# Altium PCB SIP00000AG.PcbDoc
Units mm, origin at the board's own origin, x right, y up, seen from the top; angles counter-clockwise.
Board outline 1054.6 x 677.8 mm, 2 copper layers (Top Layer, Bottom Layer); 88 components, 71 nets, 360 pads, 103 vias.
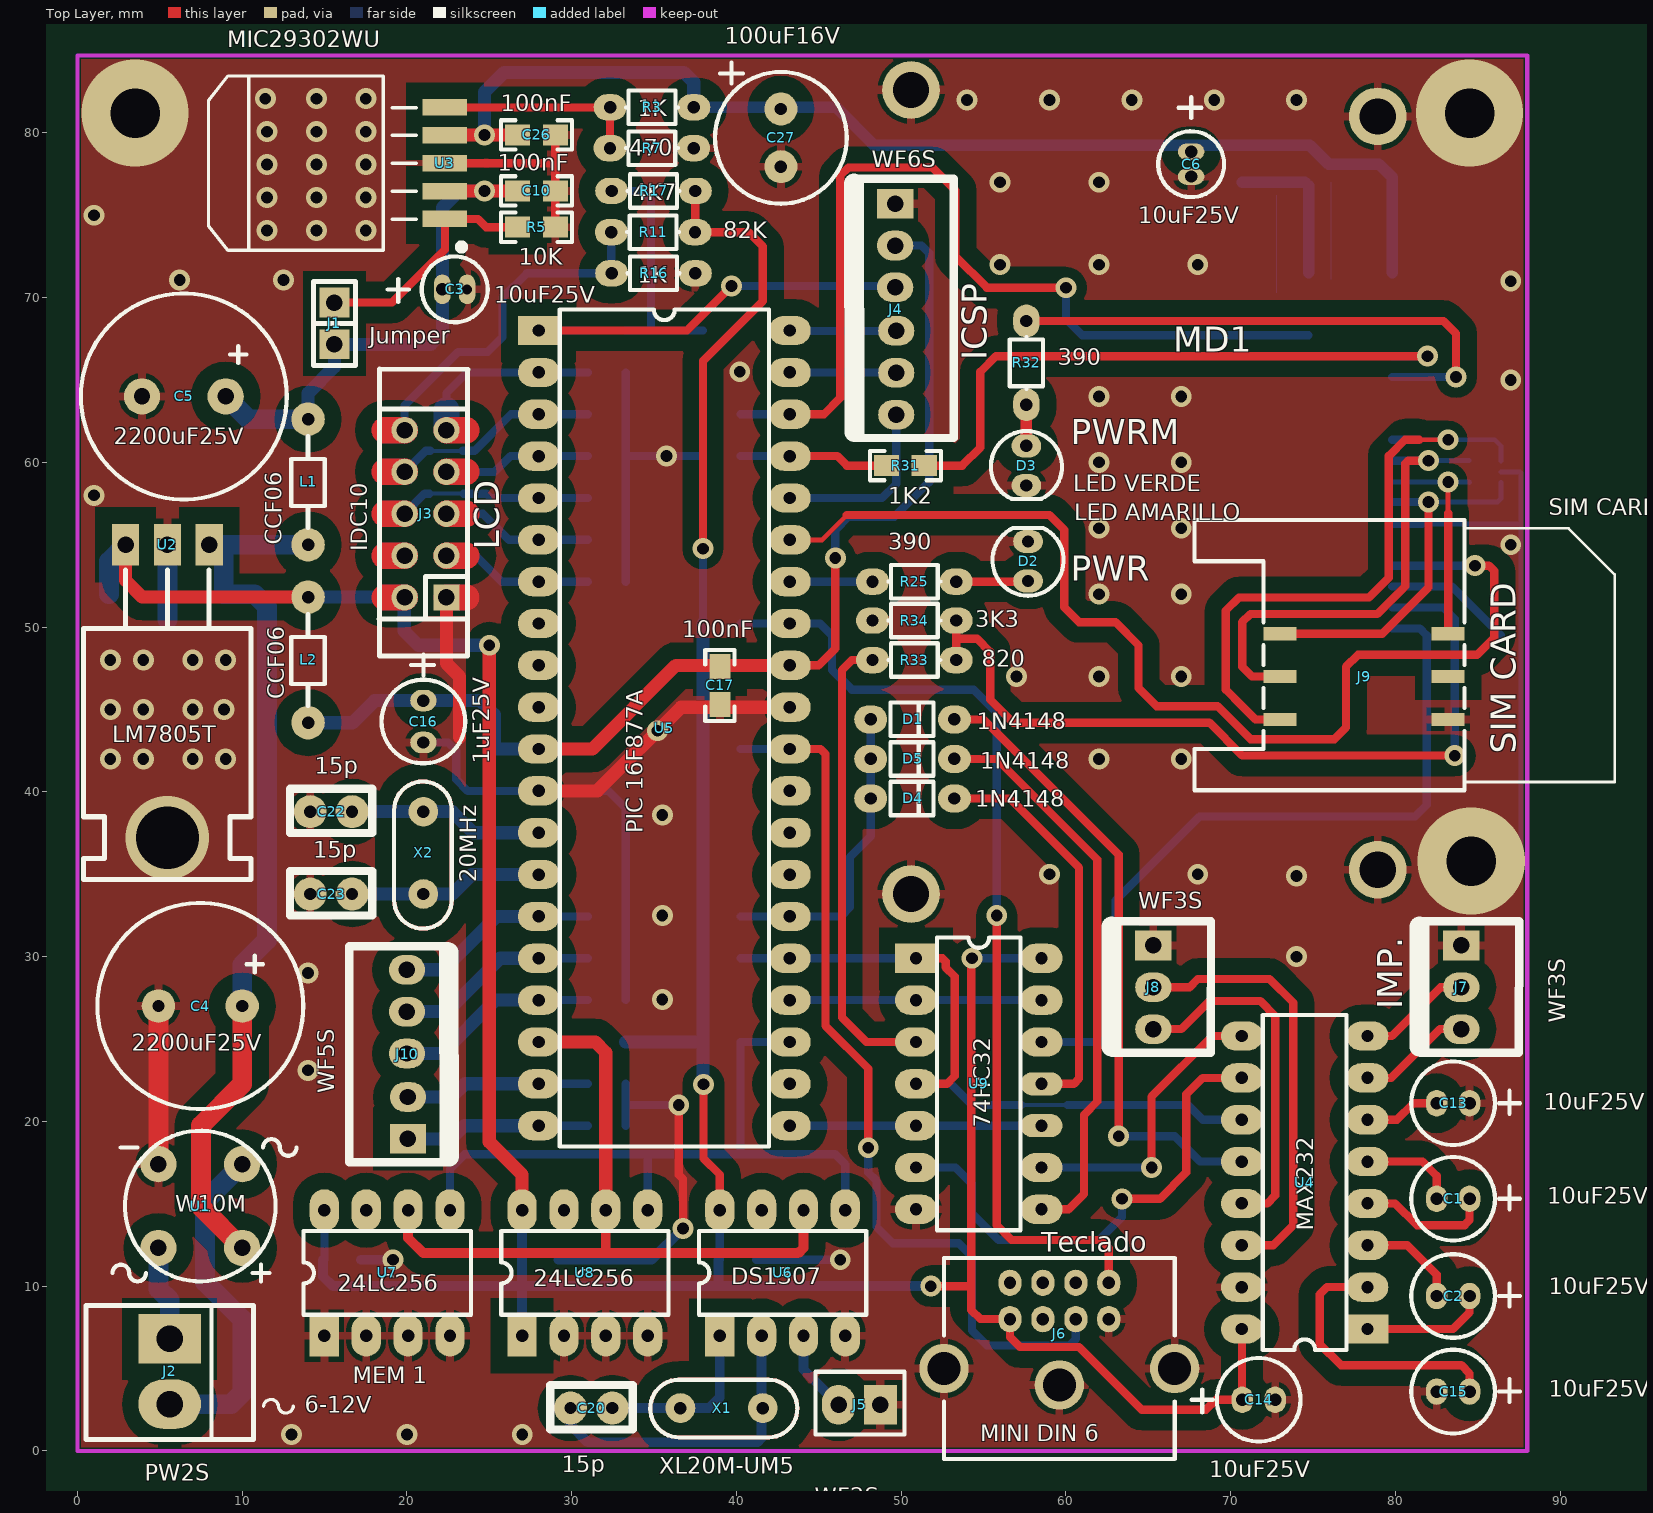
[diagram p0: Top Layer view]
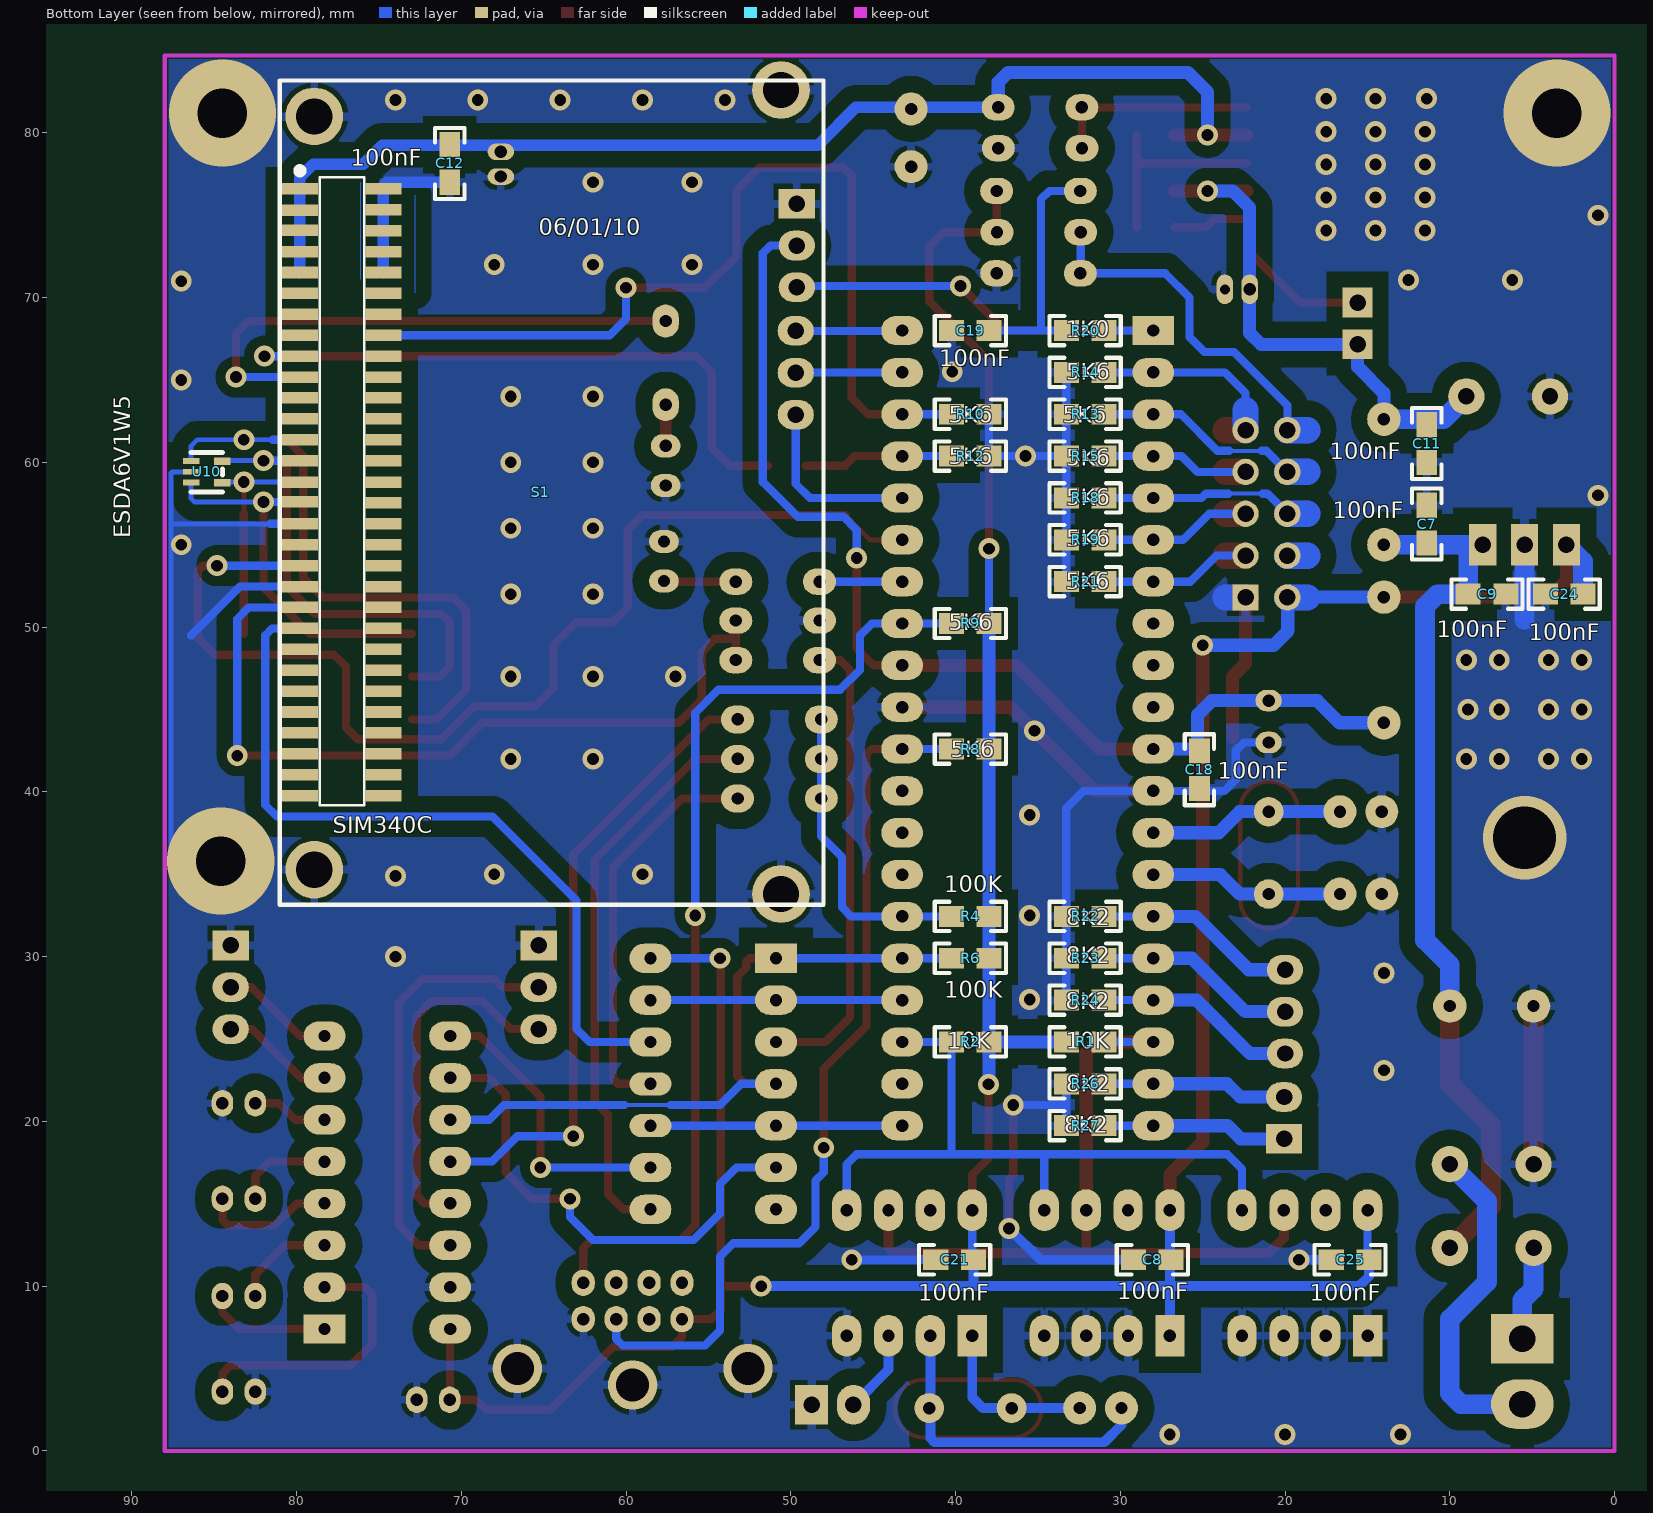
[diagram p1: Bottom Layer view, seen from below]

## Layer stack, top to bottom
Top Layer: signal copper 0.0356
Dielectric: dielectric 0.32, FR-4, Dk 4.8
Bottom Layer: signal copper 0.0356

## Board outline
-492,-340.1 -492,337.7 562.6,337.7 562.6,-340.1

## Design rules (kind name [scope] priority, off if disabled: settings)
Clearance VIAS [InNet('GND') vs (IsVia)] p1: gap=0.5
Clearance pilares [InNet('GND') vs (HasFootprint('TORNILLO 4-40'))] p2: gap=0
Clearance "Keep Out" [All vs OnLayer('Keep-Out Layer')] p3: gap=0.1
Clearance GNd [InNet('GND') vs InNet('GND')] p4: gap=0.3
Clearance [All] p5: gap=1
ComponentClearance [All] p1: gap=0.254 collisioncheckmode=3 verticalgap=0.254
PolygonConnect [All] p1: connectstyle=Relief reliefconductorwidth=0.5 reliefentries=4 polygonreliefangle="90 Angle"
RoutingVias [All] p1: holewidth=0.711 width=1.27 viastyle="Through Hole" minholewidth=0.711 minwidth=1.27 maxholewidth=0.711 maxwidth=1.27
SolderMaskExpansion [All] p1: expansion=0.102
TestPointUsage [All] p1: valid=0 allowmultiple=FALSE
Testpoint [All] p1: side=15 testpointundercomponent=TRUE minsize=1.016 maxsize=2.54 preferedsize=1.524 minholesize=0 maxholesize=1.016 preferedholesize=0.813 testpointgrid=0.025 style=1023 order=0123456789
Width [All] p1: maxlimit=2 minlimit=0.01 preferedwidth=0.2 toplayer_prefwidth=0.5 bottomlayer_prefwidth=0.5 minimp=50.000000 maximp=50.000000 favimp=50.000000
17 further rules are at their usual default settings.

## Components (designator, comment, footprint, x,y, rotation, side; value= is the part's Value field where it differs from the comment)
C1 "10uF25V" "CE 2.0/5.0" 83.5,15.3 r0 top locked
C2 "10uF25V" "CE 2.0/5.0" 83.5,9.4 r0 top locked
C3 "10uF25V" "CE 1.5/4.0"#1 22.9,70.5 r180 top locked
C4 "2200uF25V" "CE 5.0/12.5"#1 10,27 r0 top locked
C5 "2200uF25V" "CE 5.0/12.5"#2 9,64 r0 top locked
C6 "10uF25V" "CE 1.5/4.0"#2 67.6,78.1 r90 top locked
C7 "100nF" 0805 11.4,57.4 r270 bottom locked
C8 "100nF" 0805 29.2,11.6 r180 bottom locked
C9 "100nF" 0805 6.6,52 r0 bottom locked
C10 "100nF" 0805 29.007,76.473 r180 top locked
C11 "100nF" 0805 11.4,60 r90 bottom locked
C12 "100nF" 0805 70.7,77 r90 bottom locked
C13 "10uF25V" "CE 2.0/5.0" 83.5,21.1 r0 top locked
C14 "10uF25V" "CE 2.0/5.0" 71.7,3.1 r180 top locked
C15 "10uF25V" "CE 2.0/5.0" 83.5,3.6 r0 top locked
C16 "1uF25V" "CE 2.5/5.0" 21,43 r90 top locked
C17 "100nF" 0805 39,47.6 r270 top locked
C18 "100nF" 0805 25.2,40.2 r90 bottom locked
C19 "100nF" 0805 40.25,68 r180 bottom locked
C20 "15p" CAP2.54 31.2,2.6 r0 top locked
C21 "100nF" 0805 41.2,11.6 r180 bottom locked
C22 "15p" CAP2.54 15.4,38.8 r0 top locked
C23 "15p" CAP2.54 15.4,33.8 r0 top locked
C24 "100nF" 0805 4.2,52 r180 bottom locked
C25 "100nF" 0805 17.2,11.6 r180 bottom locked
C26 "100nF" 0805 29.007,79.873 r180 top locked
C27 "100uF16V" "CE 3.5/8.0" 42.7,79.7 r90 top locked
D1 "1N4148" DO-35_200 48.15,44.4 r0 top locked
D2 "LED AMARILLO" "LED 3MM" 57.7,55.2 r90 top locked
D3 "LED VERDE" "LED 3MM" 57.6,58.6 r270 top locked
D4 "1N4148" DO-35_200 48.15,39.6 r0 top locked
D5 "1N4148" DO-35_200 48.15,42 r0 top locked
J1 "Jumper" IDC2 15.6,69.7 r180 top locked
J2 "PW2S" PW2S 5.6,6.8 r270 top locked
J3 "IDC10" IDC10 22.4,51.8 r90 top locked
J4 "WF6S" WF6S 49.7,62.9 r90 top locked
J5 "WF2S" WF2S 46.2,2.8 r0 top locked
J6 "MINI DIN 6" "MINI DIN PCB" 58.6,8 r180 top locked
J7 "WF3S" WF3S 84,25.6 r90 top locked
J8 "WF3S" WF3S 65.3,25.6 r90 top locked
J9 "SIM CARD HOLDER" "SIM CARD HOLDER" 73,44.4 r90 top locked
J10 "WF5S" WF5S 20,29.2 r270 top locked
L1 "CCF06" AXIAL10X4_300 14,55 r90 top locked
L2 "CCF06" AXIAL10X4_300 14,44.2 r90 top locked
R1 "10K" 0805 30.99,24.82 r0 bottom locked
R2 "10K" 0805 40.25,24.82 r180 bottom locked
R3 "1K" RES_MF1/2W_200 32.333,81.547 r0 top locked
R4 "100K" 0805 40.25,32.44 r180 bottom locked
R5 "10K" 0805 29.007,74.273 r180 top locked
R6 "100K" 0805 40.25,29.9 r180 bottom locked
R7 "470" RES_MF1/2W_200 37.407,79.073 r180 top locked
R8 "5K6" 0805 40.25,42.6 r180 bottom locked
R9 "5K6" 0805 40.25,50.22 r180 bottom locked
R10 "5K6" 0805 40.25,62.92 r180 bottom locked
R11 "82K" RES_MF1/2W_200 32.407,73.973 r0 top locked
R12 "5K6" 0805 40.25,60.38 r180 bottom locked
R13 "5K6" 0805 30.99,62.92 r0 bottom locked
R14 "5K6" 0805 30.99,65.46 r0 bottom locked
R15 "5K6" 0805 30.99,60.38 r0 bottom locked
R16 "1K" RES_MF1/2W_200 37.507,71.473 r180 top locked
R17 "4K7" RES_MF1/2W_200 37.507,76.473 r180 top locked
R18 "5K6" 0805 30.99,57.84 r0 bottom locked
R19 "5K6" 0805 30.99,55.3 r0 bottom locked
R20 "1K0" 0805 30.99,68 r0 bottom locked
R21 "5K6" 0805 30.99,52.76 r0 bottom locked
R22 "8K2" 0805 30.99,32.44 r0 bottom locked
R23 "8K2" 0805 30.99,29.9 r0 bottom locked
R24 "8K2" 0805 30.99,27.36 r0 bottom locked
R25 "390" RES_MF1/2W_200 48.26,52.76 r0 top locked
R26 "8K2" 0805 30.99,22.28 r0 bottom locked
R27 "8K2" 0805 30.99,19.74 r0 bottom locked
R31 "1K2" 0805 51.4,59.8 r180 top locked
R32 "390" RES_MF1/2W_200 57.6,63.5 r90 top locked
R33 "820" RES_MF1/2W_200 48.26,48 r0 top locked
R34 "3K3" RES_MF1/2W_200 48.26,50.4 r0 top locked
S1 "SIM340C" SIM340C 76.8,76.6 r180 bottom locked
U1 "W10M" CASE22 10,17.4 r0 top locked
U2 "LM7805T" TO-220_1 8,55 r180 top locked
U3 "MIC29302WU" TO-220-5S 22.307,74.773 r90 top locked
U4 "MAX232" DIP16 78.3,7.4 r180 top locked
U5 "PIC 16F877A" DIP40 28,68 r0 top locked
U6 "DS1307" DIP8 42.8,10.8 r90 top locked
U7 "24LC256" DIP8 18.8,10.8 r90 top locked
U8 "24LC256" DIP8 30.8,10.8 r90 top locked
U9 "74HC32" DIP14 50.9,29.9 r0 top locked
U10 "ESDA6V1W5" SOT-323-5L 84.1,58.8 r90 bottom locked
X1 "XL20M-UM5" UM5#1 41.6,2.6 r180 top locked
X2 "20MHz" UM5#2 21,33.8 r90 top locked

## Footprints (in the part's own frame and the unit in brackets; to place one, negate y for a bottom-side part, rotate by r counter-clockwise, add the part's x,y. Pads: shape width x height; smd on the part's side, far side on the other; paste and mask are expansions set on the pad)
0805 [mil]
  rect 60x50 smd: 1(0,0) 2(90,0)
  silkscreen extent -40,-35 130,35
AXIAL10X4_300 [mil]
  round 80 hole 29.53: 1(0,0) 2(300,0)
  silkscreen extent 41,-40 259,40
CAP2.54 [mm] "CAPACITOR AXIAL 2.54"
  round 2 hole 0.75: 1(-1.27,0) 2(1.27,0)
  silkscreen extent -2.5,-1.3 2.5,1.4
CASE22 [mm]
  round 2.2 hole 1: 1(0,-5.08) 2(0,0) 3(-5.08,0) 4(-5.08,-5.08)
  silkscreen extent -7.87,-7.11 3.3,2.03
"CE 1.5/4.0"#1 [mm]
  oval 1x1.8 hole 0.75: 1(0.75,0)
  oval 1x1.8 hole 0.6: 2(-0.75,0)
  silkscreen extent -2,-2 4.06,2
"CE 1.5/4.0"#2 [mm]
  oval 1x1.6 hole 0.75: 1(0.75,0) 2(-0.75,0)
  silkscreen extent -2,-2 4.06,2
"CE 2.0/5.0" [mm]
  oval 1.3x1.6 hole 0.75: 1(1,0) 2(-1,0)
  silkscreen extent -2.54,-2.54 4.06,2.54
"CE 2.5/5.0" [mm]
  oval 1.3x1.6 hole 0.75: 1(2.54,0) 2(0,0)
  silkscreen extent -1.27,-2.54 5.33,2.54
"CE 3.5/8.0" [mm]
  round 2 hole 0.75: 1(1.75,0) 2(-1.75,0)
  silkscreen extent -4,-4 4.57,4
"CE 5.0/12.5"#1 [mil]
  round 80 hole 29.53: 1(0,0) 2(-200,0)
  silkscreen extent -346,-246 146,246
"CE 5.0/12.5"#2 [mil]
  round 86.61 hole 39.37: 1(0,0) 2(-200,0)
  silkscreen extent -346,-246 146,246
DIP8 [mm]
  rect 2.54x1.778 hole 0.75: 1(-3.81,3.81)
  oval 2.54x1.778 hole 0.75: 2(-3.81,1.27) 3(-3.81,-1.27) 4(-3.81,-3.81) 5(3.81,-3.81) 6(3.81,-1.27) 7(3.81,1.27) 8(3.81,3.81)
  silkscreen extent -2.54,-5.08 2.54,5.08
DIP14 [mm]
  rect 2.54x1.778 hole 0.75: 1(0,0)
  oval 2.54x1.778 hole 0.75: 2(0,-2.54) 3(0,-5.08) 4(0,-7.62) 5(0,-10.16) 6(0,-12.7) 7(0,-15.24) 8(7.62,-15.24) 9(7.62,-12.7) 12(7.62,-5.08) 13(7.62,-2.54) 14(7.62,0)
  oval 2.54x1.4 hole 0.75: 10(7.62,-10.16) 11(7.62,-7.62)
  silkscreen extent 1.27,-16.51 6.35,1.27
DIP16 [mm]
  rect 2.54x1.778 hole 0.75: 1(0,0)
  oval 2.54x1.778 hole 0.75: 2(0,-2.54) 3(0,-5.08) 4(0,-7.62) 5(0,-10.16) 6(0,-12.7) 7(0,-15.24) 8(0,-17.78) 9(7.62,-17.78) 10(7.62,-15.24) 11(7.62,-12.7) 12(7.62,-10.16) 13(7.62,-7.62) 14(7.62,-5.08) 15(7.62,-2.54) 16(7.62,0)
  silkscreen extent 1.27,-19.05 6.35,1.27
DIP40 [mm]
  rect 2.54x1.778 hole 0.75: 1(0,0)
  oval 2.54x1.778 hole 0.75: 2(0,-2.54) 3(0,-5.08) 4(0,-7.62) 5(0,-10.16) 6(0,-12.7) 7(0,-15.24) 8(0,-17.78) 9(0,-20.32) 10(0,-22.86) 11(0,-25.4) 12(0,-27.94) 13(0,-30.48) 14(0,-33.02) 15(0,-35.56) 16(0,-38.1) 17(0,-40.64) 18(0,-43.18) 19(0,-45.72) 20(0,-48.26) 21(15.24,-48.26) 22(15.24,-45.72) 23(15.24,-43.18) 24(15.24,-40.64) 25(15.24,-38.1) 26(15.24,-35.56) 27(15.24,-33.02) 28(15.24,-30.48) 29(15.24,-27.94) 30(15.24,-25.4) 31(15.24,-22.86) 32(15.24,-20.32) 33(15.24,-17.78) 34(15.24,-15.24) 35(15.24,-12.7) 36(15.24,-10.16) 37(15.24,-7.62) 38(15.24,-5.08) 39(15.24,-2.54) 40(15.24,0)
  silkscreen extent 1.27,-49.53 13.97,1.27
DO-35_200 [mm]
  oval 2x1.7 hole 0.75: A(0,0) K(5.08,0)
  silkscreen extent 1.21,-1.02 3.81,1.02
IDC2 [mm]
  rect 1.8x1.8 hole 1: 1(0,0) 2(0,2.54)
  silkscreen extent -1.27,-1.27 1.27,3.81
IDC10 [mm]
  rect 1.6x1.6 hole 1: 1(0,0)
  round 1.6 hole 1: 2(0,2.54) 3(2.54,0) 4(2.54,2.54) 5(5.08,0) 6(5.08,2.54) 7(7.62,0) 8(7.62,2.54) 9(10.16,0) 10(10.16,2.54)
  silkscreen extent -3.56,-1.3 13.86,4.09
"LED 3MM" [mm]
  oval 1.4x1.8 hole 0.75: A(-2.4,0) K(0,0)
  silkscreen extent -3.3,-2.16 0.82,2.16
"MINI DIN PCB" [mm] "CONECTOR MINI DIN 6 A 90 GRADOS PARA PCB"
  oval 1.4x1.6 hole 0.75: 1(-2,0) 2(0,0) 3(-4,0) 4(2,0) 5(-4,-2.2) 6(2,-2.2) 7(-2,-2.2) 8(0,-2.2)
  round 3 hole 2: 9(-8,3) 9(-1,4) 9(6,3)
  silkscreen extent -8,-3.7 6,8.5
PW2S [mm]
  rect 3x3.8 hole 1.6: 1(0,0)
  oval 3x3.8 hole 1.6: 2(3.962,0)
  silkscreen extent -2.03,-5.08 6.11,5.08
RES_MF1/2W_200 [mm]
  oval 2x1.6 hole 0.75: 1(0,0) 2(5.08,0)
  silkscreen extent 0.97,-1.02 4.11,1.02
SIM340C [mm] "SIM340C"
  round 3.5 hole 2.2: 0(-2.125,-41.325) 0(-2.125,4.4) 0(26.2,-42.8) 0(26.2,6)
  rect 2.2x0.7 smd: 1(-3,0) 2(2.076,0) 3(-3,-1.3) 4(2.076,-1.269) 5(-3,-2.5) 6(2.076,-2.538) 7(-3,-3.807) 8(2.076,-3.807) 9(-3,-5.076) 10(2.076,-5.076) 11(-3,-6.345) 12(2.076,-6.345) 13(-3,-7.614) 14(2.076,-7.614) 15(-3,-8.883) 16(2.076,-8.883) 17(-3,-10.152) 18(2.076,-10.152) 19(-3,-11.421) 20(2.076,-11.421) 21(-3,-12.69) 22(2.076,-12.69) 23(-3,-13.959) 24(2.076,-13.959) 25(-3,-15.228) 26(2.076,-15.228) 27(-3,-16.497) 28(2.076,-16.497) 29(-3,-17.793) 30(2.076,-17.793) 31(-3,-19) 32(2.076,-19.062) 33(-3,-20.331) 34(2.076,-20.331) 35(-3,-21.6) 36(2.076,-21.6) 37(-3,-22.869) 38(2.076,-22.869) 39(-3,-24.138) 40(2.076,-24.138) 41(-3,-25.407) 42(2.076,-25.407) 43(-3,-26.676) 44(2.076,-26.676) 45(-3,-27.945) 46(2.076,-27.945) 47(-3,-29.214) 48(2.076,-29.214) 49(-3,-30.483) 50(2.076,-30.483) 51(-3,-31.752) 52(2.076,-31.752) 53(-3,-33.021) 54(2.076,-33.021) 55(-3,-34.29) 56(2.076,-34.29) 57(-3,-35.559) 58(2.076,-35.559) 59(-3,-36.828) 60(2.076,-36.828)
  silkscreen extent -4.23,-43.45 28.77,6.58
"SIM CARD HOLDER" [mm] "SIM CARD HOLDER"
  rect 0.8x2 smd: 1(0,0) 2(2.6,0) 3(5.2,0) 4(0,-10.2) 5(2.6,-10.2) 6(5.2,-10.2)
  silkscreen extent -4.3,-20.3 12.1,5.2
SOT-323-5L [mm]
  rect 0.45x1 smd: 1(-0.025,0.4) 2(1.275,0.4)
  rect 0.35x1 smd: 3(0.625,2.3) 4(-0.025,2.3) 5(1.275,2.3)
  silkscreen extent -0.6,0.4 1.8,2.3
TO-220-5S [mm]
  rect 1x2.7 smd: 1(0,0) 2(1.693,0) 3(3.387,0) 4(5.08,0) 5(6.773,0)
  silkscreen extent -1.91,-1.2 8.68,14.35
TO-220_1 [mm]
  rect 1.651x2.54 hole 1: 1(0,0) 2(2.54,0) 3(5.08,0)
  silkscreen extent -2.54,1.52 7.62,20.32
UM5#1 [mm] "UM-5"
  round 1.8 hole 0.762: 1(0,0) 2(5,0)
  Top Layer lines w0.254: 5.114,-1.722 ccw(c5.08,0.028) 5.08,1.778 -0.381,1.778 ccw(c-0.347,0.028) -0.347,-1.722 5.08,-1.722
  silkscreen extent -2.1,-1.72 6.83,1.78
UM5#2 [mm] "UM-5"
  round 1.8 hole 0.75: 1(0,0) 2(5,0)
  Top Layer lines w0.254: 5.08,-1.722 -0.347,-1.722 cw(c-0.347,0.028) -0.381,1.778 5.08,1.778 cw(c5.08,0.028) 5.114,-1.722
  silkscreen extent -2.1,-1.72 6.83,1.78
WF2S [mm]
  rect 2x2.4 hole 1: 1(2.54,0)
  oval 2x2.4 hole 1: 2(0,0)
  silkscreen extent -1.4,-1.8 4,2
WF3S [mm]
  rect 1.8x2.2 hole 1: 1(5.08,0)
  oval 1.8x2.2 hole 1: 2(2.54,0) 3(0,0)
  silkscreen extent -1.42,-3.51 6.55,2.54
WF5S [mm]
  rect 1.8x2.2 hole 1: 1(10.26,0.062)
  oval 1.8x2.2 hole 1: 2(7.72,0.062) 3(5.08,0) 4(2.54,0) 5(0,0)
  silkscreen extent -1.42,-3.51 11.68,2.57
WF6S [mm]
  rect 1.8x2.2 hole 1: 1(12.8,0.062)
  oval 1.8x2.2 hole 1: 2(10.26,0.062) 3(7.72,0.062) 4(5.08,0) 5(2.54,0) 6(0,0)
  silkscreen extent -1.42,-3.49 14.32,2.57

## Part data
C1 C2 C13 C14 C15: library part "10uF25V 5X11X2", "CAPACITOR ELECTROLITICO RADIAL 5X11mm PASO 2mm 85ªC +/-20 25V 10uF"
C3 C6: library part "10uF25V 4X7X1.5", "CAPACITOR ELECTROLITICO RADIAL 5X7mm PASO 1.5mm 85ªC +/-20 25V 10uF"
C4 C5: "CAPACITOR ELECTROLITICO RADIAL 12.5X26 mm PASO 5 mm +/-20% 85ºC 25V 2200uF"
C7 C8 C9 C10 C11 C12 C17 C18 C19 C21 C24 C25 C26: library part 100n, "CAPACITOR SMD 0805 X7R  50 V 100 nF"
C16: "CAP ELECT RAD 1.0UF 25V 5X11MM PASO 2MM 85ºC"
C20 C22 C23: "CAPACITOR CERAMICO DISCO 2.54 mm  X7R  50V  15pF"
C27: "CAP ELECT RADIAL 100UF 16V 6.3X12MM PASO 2.5MM 85ºC 20%"
D1 D4 D5: library part "1N4148 DO-35", "1N4148 DO-35 DIODO"
D2: library part "LED AMARILLO 3MM", "LED AMARILLO 3MM"
D3: library part "LED VERDE 3MM", "LED VERDE 3MM"
J2: "PW2S HEADER .156\" RECTO 2 VIAS"
J3: "CONECTOR IDC HEMBRA PCB NO POLARIZADO PASO 2.54 mm RECTO 2X5 VIAS"
J4: "WF6S CONECTOR MACHO PASO 2.54 MM  6 VIAS RECTO"
J5: "WF2S HEADER .100\" RECTO 2 VIAS"
J6: library part "CONECTOR MINI DIN 6", "CONECTOR MINI DIN 6 PARA PCB"
J7 J8: "WF3S HEADER .100\" RECTO 3 VIAS"
J9: "ZOCALO PARA TARJETA DE MEMORIA SIM"
J10: "WF5S HEADER .100\" RECTO 5 VIAS"
L1 L2: "INDUCTOR CCF06"
R1 R2 R5: "RESISTOR SMD0805 0.125 W 5%  10 K OHMS"
R3 R16: "RESISTOR METAL FILM 0.5 W 5% 1 K OHMS"
R4 R6: "RESISTOR SMD0805 0.125 W 5%  100 K OHMS"
R7: "RESISTOR METAL FILM 0.5 W 5% 470 OHMS"
R8 R9 R10 R12 R13 R14 R15 R18 R19 R21: "RESISTOR SMD0805 0.125 W 5%  5.6 K OHMS"
R11: "RESISTOR METAL FILM 0.5 W 5% 82 KILOHMS"
R17: "RESISTOR METAL FILM 0.5 W 5% 4.7 KILOHMS"
R20: "RESISTOR SMD0805 0.125 W 5%  1 K OHMS"
R22 R23 R24 R26 R27: "RESISTOR SMD0805 0.125 W 5%  8.2 K OHMS"
R25 R32: "RESISTOR METAL FILM 0.5 W 5% 390 OHMS"
R31: "RESISTOR SMD0805 0.125 W 5%  1.2 K OHMS"
R33: "RESISTOR METAL FILM 0.5 W 5% 820 OHMS"
R34: "RESISTOR METAL FILM 0.5 W 5% 3.3 KILOHMS"
S1: library part "SIM340C QUAD-BAND GSM/GPRS", "SIM340C QUAD-BAND GSM/GPRS GSM850MHz/EGSM900MHz/DCS18000MHz/PCS1900MHz"
U1: "W10M CASE22 CIRC INT RECTIFICADOR PUENTE 1000V 1A"
U2: "LM7805T TO-220 CIRC INT"
U3: "MIC29302WU TO-220 (T) HIGH CURRENT LOW DROPOUT REGULATORS"
U4: library part "MAX232 DIP-16", "MAX232 DIP-16 CIRCUITO INTEGRADO"
U5: "PIC16F877A-I/P DIP-40 MICROCHIP"
U6: "64 X 8 SERIAL REAL TIME CLOCK"
U7 U8: "256K I2C CMOS Serial EEPROM"
U9: library part "74HC08 DIP", "74HC32 DIP-14 QUAD 2-INPUT OR GATE"
U10: "ESDA6V1W5 ARRAY  FOR ESD PROTECTION"
X1: "XL20M-UM5 CRISTAL DE 20 MHZ 10ppm"
X2: library part CRYSTAL, "20.000 MHZ XL20M-UM5 10PPM CRISTAL"

## Free pads (board coordinates)
  round 1.4 on Top Overlay: 0(24.8,51.8)

## Via types
v1: diameter 1.27, hole 0.711, Top Layer to Bottom Layer, 99 vias
v2: diameter 6.5, hole 3, Top Layer to Bottom Layer, 3 vias
v3: diameter 5.08, hole 3.81, Top Layer to Bottom Layer, 1 vias

## Nets (pads, with @x,y where several pads share a name; then routed paths per layer and width w, separated by ;. In a path a pad name is that pad's centre, name@x,y a point inside that pad or via, vN(x,y) a via of type N, cw(c..) or ccw(c..) an arc to the next point about the centre after c; other vN are vias at no path point)
+5V: C8.2 C14.1 C21.2 C24.2 C25.2 J3.2 J6.4 L2.2 R1.2 R2.2 R4.2 R6.2 R8.2 R9.2 R11.2 R17.1 U2.3 U4.16 U6.8 U7.8 U8.1 U8.8 U9.14 | length 245.5
  Top Layer w0.5: R11.2 40.727,73.973 41.6,73.1 41.6,69.8 37.964,66.164 v1(37.964,54.764) ; R11.2@37.507,73.993 R17.1 ; v1(38,22.25) 38,17.75 38.99,16.76 U6.8 ; v1(51.8,10) 54.25,10 ; v1@54.25,29.85 54.25,8.55 54.8,8 J6.4 56.6,6.9 57.2,6.3 60.8,6.3 64.6,2.5 68.5,2.5 69.1,3.1 C14.1 ; C14.1@70.68,3.1 U4.16
  Top Layer w0.8: U2.3 2.92,52.83 3.93,51.82 L2.2 ; v1(25,48.9) 25,18.75 26.99,16.76 U8.8
  Top Layer w1.6: 18.66,51.8 J3.2
  Bottom Layer w0.5: C25.2@14.99,11.62 U7.8 ; R9.2 v1(37.964,54.764) ; C21.2@38.99,11.62 U6.8 ; v1(54.3,29.9) U9.14
  Bottom Layer w0.6: C25.2 14.914,10.586 15.5,10 v1(51.8,10) ; U8.1 U8.8 ; 38.914,10.014 C21.2
  Bottom Layer w0.8: L2.2 19.84,51.82 19.84,49.76 20.7,48.9 v1(25,48.9) ; R1.2 R2.2 ; v1@37.964,22.286 R9.2
  Bottom Layer w1.2: C24.2 1.914,53.994 U2.3
  Bottom Layer w1.6: 18.66,51.8 J3.2
AD4: J3.7 R15.1 U5.4 | length 10.2
  Top Layer w1.6: J3.7 23.6,59.42
  Bottom Layer w0.5: J3.7 25.32,59.42 26.28,60.38 R15.1
AD5: J3.6 R18.1 U5.5 | length 14.1
  Top Layer w1.6: 18.66,56.88 J3.6
  Bottom Layer w0.25: 21.365,58.1 23.435,58.1
  Bottom Layer w0.5: J3.6 21.08,58.1 21.365,58.1 ; 23.435,58.1 24.814,58.1 25.074,57.84 R18.1
  Bottom Layer w1.6: 18.66,56.88 J3.6
AD6: J3.5 R19.1 U5.6 | length 10.4
  Top Layer w1.6: J3.5 23.6,56.88
  Bottom Layer w0.5: J3.5 24.62,56.88 26.2,55.3 R19.1
AD7: J3.3 R21.1 U5.7 | length 10.4
  Top Layer w1.6: J3.3 23.6,54.34
  Bottom Layer w0.5: J3.3 24.16,54.34 25.74,52.76 R21.1
AUX_1: U5.29
AUX_C_1: J10.5 R22.1 U5.15 | length 12.3
  Bottom Layer w0.5: U5.15 R22.1
  Bottom Layer w0.8: J10.5 22.2,29.2 25.44,32.44 U5.15
AUX_C_2: J10.4 R23.1 U5.16 | length 12.3
  Bottom Layer w0.5: U5.16 R23.1
  Bottom Layer w0.8: J10.4 22.41,26.66 25.65,29.9 U5.16
AUX_C_3: J10.3 R24.1 U5.17 | length 12.3
  Bottom Layer w0.5: U5.17 R24.1
  Bottom Layer w0.8: J10.3 22.13,24.12 25.37,27.36 U5.17
AUX_D_1: J10.2 R26.1 U5.19 | length 11.3
  Bottom Layer w0.5: U5.19 R26.1
  Bottom Layer w0.8: J10.2 22.73,21.48 23.53,22.28 U5.19
AUX_D_3: J10.1 R27.1 U5.20 | length 11.3
  Bottom Layer w0.5: U5.20 R27.1
  Bottom Layer w0.8: J10.1 22.69,18.94 23.49,19.74 U5.20
DCD: S1.37 U5.35 | length 68.4
  Top Layer w0.3: U5.35 45.2,55.3 46.7,56.8
  Top Layer w0.5: 46.7,56.8 59,56.8 59.9,55.9 59.9,51.2 60.8,50.3 63,50.3 64.4,48.9 64.4,46.3 65.5,45.2 69.2,45.2 71.2,43.2 76.3,43.2 77,43.9 77,47.6 77.719,48.319 84.95,48.319 86,49.369 86,53.4 85.669,53.731 v1(84.831,53.731)
  Bottom Layer w0.5: S1.37 v1(84.831,53.731)
E: J3.8 R13.1 U5.3 | length 14.9
  Top Layer w1.6: 18.66,59.42 J3.8
  Bottom Layer w0.25: 21.414,60.7 23.314,60.7
  Bottom Layer w0.5: J3.8 21.14,60.7 21.414,60.7 ; 23.386,60.7 24.1,60.7 26.32,62.92 R13.1
  Bottom Layer w1.6: 18.66,59.42 J3.8
ENCENDIDO: R12.1 R31.2 U5.37 | length 9.1
  Top Layer w0.5: U5.37 46.12,60.38 46.7,59.8 R31.2
  Bottom Layer w0.5: R12.1 U5.37
ESTADO: R25.1 U5.34 | length 5
  Bottom Layer w0.5: U5.34 R25.1
GND: C3.2 C4.2 C5.2 C6.2 C7.1 C8.1 C9.1 C10.1 C11.1 C12.1 C13.1 C14.2 C15.2 C16.2 C17.2 C18.1 C19.1 C21.1 C22.1 C23.1 C24.1 C25.1 C26.1 C27.2 D2.K D3.K J3.1 J4.1 J5.1 J6.3 J6.9 J7.1 J8.1 J9.4 R5.1 R7.1 R10.2 R12.2 R13.2 R14.2 R15.2 R16.1 R18.2 R19.2 R21.2 R22.2 R23.2 R24.2 R26.2 R27.2 R34.1 S1.0 S1.2 S1.4 S1.6 S1.8 S1.10 S1.33 S1.39 U1.3 U2.2 U3.3 U4.15 U5.12 U5.31 U6.4 U7.1 U7.2 U7.3 U7.4 U8.2 U8.3 U8.4 U9.7 U10.3 | length 179.6
  Top Layer w0.5: U3.3 28.993,78.16 ; R5.1 C26.1 ; v1(36.5,21) 36.5,16.75 36.75,16.5 v1(36.75,13.5)
  Top Layer w0.8: J3.1 22.4,47.8 23.2,47 23.2,43.3 ; U5.12 31.56,40.06 36.64,45.14 U5.31
  Top Layer w1.2: U1.3 C4.2
  Top Layer w1.6: J3.1 23.6,51.8
  Bottom Layer w0.3: 81.617,56.269 87.592,56.269 ; U10.3 87.55,59.425 87.623,59.352 v2@87.623,36.323
  Bottom Layer w0.5: C16.2 22.5,43 23,42.5 23,40.75 23.69,40.06 32.24,40.06 33.276,39.024 R24.2 ; R27.2 R26.2 ; 33.276,21 v1(36.5,21) ; R21.2 R14.2 ; R15.2 R12.2 R10.2 ; C21.1 v1(46.3,11.6) ; S1.39 83.438,52.462 86.4,49.5 ; S1.33 81.617,56.269
  Bottom Layer w0.6: C25.1 v1(19.15,11.6) ; C8.1 34.85,11.6 v1(36.75,13.5)
  Bottom Layer w0.7: C12.1 74.5,77 74.724,76.776 S1.10
  Bottom Layer w1.2: 5.46,50.46 U2.2
  Bottom Layer w1.6: J3.1 23.6,51.8
  other v1: 13,1 20,1 27,1 14,23.1 35.5,27.4 14,29 74,30 35.5,32.5 74,34.9 59,35 68,35 35.5,38.6 2,42 4,42 7,42 9,42 62,42 67,42 35.212,43.712 2,45 4,45 7,45 8.9,45 57,47 62,47 67,47 2,48 4,48 7,48 9,48 62,52 67,52 87,55 62,56 67,56 1,58 62,60 67,60 35.75,60.38 62,64 67,64 87,65 40.2,65.5 87,71 6.207,71.073 12.507,71.073 56,72 62,72 68,72 11.507,74.073 14.507,74.073 17.507,74.073 1,75 11.507,76.073 14.507,76.073 17.507,76.073 56,77 62,77 11.507,78.073 14.507,78.073 17.507,78.073 11.507,80.073 14.507,80.073 17.507,80.073 54,82 59,82 64,82 69,82 74,82 11.407,82.073 14.507,82.073 17.507,82.073
  other v2: 84.6,35.8 3.5,81.2 84.5,81.2
  other v3: 5.46,37.22
I2C_SCL: R1.1 U5.18 U6.6 U7.6 U8.6 | length 47.9
  Top Layer w0.6: U7.6 20.07,12.93 21,12 43.75,12 44.07,12.32 U6.6 ; 32.07,12.07 U8.6
  Top Layer w0.8: U5.18 31.43,24.82 32.07,24.18 U8.6
  Bottom Layer w0.5: U5.18 R1.1
I2C_SDA: R2.1 U5.23 U6.5 U7.5 U8.5 | length 42.9
  Bottom Layer w0.5: U7.5 22.61,17.11 23.5,18 46,18 46.61,17.39 U6.5 ; U8.5 34.61,17.86 ; 40.25,18.05 R2.1 U5.23
IMPRESORA: U5.21 U9.5 U9.10 | length 15.3
  Bottom Layer w0.5: U5.21 U9.10
MODEM: U5.24 U9.2 U9.13 | length 15.3
  Bottom Layer w0.5: U5.24 U9.13
NET_STATE: R10.1 S1.16 U5.38 | length 56.3
  Top Layer w0.5: U5.38 45.32,62.92 46.3,63.9 46.3,77.4 46.8,77.9 51.9,77.9 53.3,76.5 53.3,72.5 55.2,70.6 v1(60,70.6)
  Bottom Layer w0.5: R10.1 U5.38 ; v1(60,70.6) 60,68.7 60.983,67.717 S1.16
NetC1_1: C1.1 U4.4 | length 8.2
  Top Layer w0.5: U4.4 79.98,15.02 81.3,13.7 84.2,13.7 84.5,14 C1.1
NetC1_2: C1.2 U4.5 | length 6
  Top Layer w0.5: U4.5 81.64,17.56 82.5,16.7 C1.2
NetC2_1: C2.1 U4.1 | length 8.1
  Top Layer w0.5: U4.1 83.5,7.4 84.5,8.4 C2.1@84.5,9.9
NetC2_2: C2.2 U4.3 | length 6.2
  Top Layer w0.5: U4.3 80.72,12.48 82.5,10.7 C2.2
NetC3_1: C3.1 C5.1 C10.2 C11.2 J1.2 L1.2 U3.2 | length 32.6
  Top Layer w0.8: U3.2 C10.2@26.714,76.467
  Bottom Layer w0.8: L1.2 14,64.2 15.6,65.8 J1.2 21.46,67.16 22.15,67.85 22.15,75.45 23.173,76.473 v1(24.707,76.473)
  Bottom Layer w1.2: C5.1 10.38,62.62 L1.2
NetC13_2: C13.2 U4.6 | length 4.6
  Top Layer w0.5: U4.6 80.1,20.1 81.1,21.1 C13.2
NetC15_1: C15.1 U4.2 | length 17
  Top Layer w0.5: U4.2 75.84,9.94 75.4,9.5 75.4,6.5 76.7,5.2 84,5.2 84.5,4.7 C15.1
NetC19_2: C19.2 R17.2 R20.2 | length 15.2
  Bottom Layer w0.5: R17.2 34.307,76.473 34.807,75.973 34.807,68.007 ; R20.2 C19.2
NetC20_1: C20.1 U6.2 X1.1 | length 19.4
  Bottom Layer w0.6: C20.1 29.93,1.57 30.973,0.527 41.277,0.527 41.53,0.78 U6.2
NetC20_2: C20.2 U6.1 X1.2 | length 10.5
  Bottom Layer w0.6: C20.2 38.35,2.6 38.99,3.24 U6.1
NetC22_2: C22.2 U5.13 X2.2 | length 11.9
  Bottom Layer w0.8: C22.2 22.75,38.8 24.03,37.52 U5.13
NetC23_2: C23.2 U5.14 X2.1 | length 11.8
  Bottom Layer w0.8: C23.2 22.75,33.8 23.93,34.98 U5.14
NetD1_K: D1.K U4.12 | length 38.6
  Top Layer w0.5: D1.K 55,44.4 63.2,36.2 v1(63.2,19.1)
  Bottom Layer w0.5: v1(63.2,19.1) 66.6,19.1 68.14,17.56 U4.12
NetD2_A: D2.A R25.2 | length 4.3
  Top Layer w0.5: R25.2 D2.A@57.66,52.76
NetD3_A: D3.A R32.1 | length 2.5
  Top Layer w0.7: D3.A R32.1
NetD4_K: D4.K U9.11 | length 24.5
  Top Layer w0.5: D4.K 56.6,39.6 59.931,36.269 60.8,35.4 60.8,22.6 60.48,22.28 U9.11
NetD5_K: D5.K U9.8 | length 34.8
  Top Layer w0.5: D5.K 55.8,42 61.9,35.9 61.9,21.2 61.1,20.4 61.1,15.6 60.16,14.66 U9.8
NetJ1_1: J1.1 R5.2 U3.1 | length 14.5
  Top Layer w0.5: J1.1 19.1,69.7 22.307,72.907 U3.1 24.307,74.773 24.807,74.273 R5.2
NetJ2_1: J2.1 U1.4 | length 5.8
  Bottom Layer w1.2: U1.4 4.92,9.83 5.6,9.15 J2.1
NetJ2_2: J2.2 U1.2 | length 20.4
  Bottom Layer w1.2: J2.2 9.338,2.838 10,3.5 10,8 7.75,10.25 7.75,15.15 U1.2
NetJ3_10: J3.10 R11.1 R16.2 | length 23.7
  Top Layer w1.6: 18.66,61.96 J3.10
  Bottom Layer w0.5: J3.10 19.86,63.46 23.1,66.7 24.9,66.7 25.8,67.6 25.8,70 27.273,71.473 R16.2 ; R16.2@32.407,71.493 R11.1
  Bottom Layer w1.6: 18.66,61.96 J3.10
NetJ5_2: J5.2 U6.3 | length 5.1
  Bottom Layer w0.6: U6.3 44.07,4.93 J5.2
NetR3_1: R3.1 R7.2 U3.5 | length 12.5
  Top Layer w0.5: U3.5 R3.1 R7.2@32.333,79.067
NetR31_1: R31.1 S1.17 | length 38.1
  Top Layer w0.5: R31.1 53.7,59.8 54.8,60.9 54.8,65.5 55.748,66.448 v1(81.948,66.448)
  Bottom Layer w0.5: S1.17 v1(81.948,66.448)
NetR32_2: R32.2 S1.19 | length 32.9
  Top Layer w0.5: R32.2 82.92,68.58 83.679,67.821 v1(83.679,65.179)
  Bottom Layer w0.5: S1.19 v1(83.679,65.179)
NetR33_2: R33.2 R34.2 S1.41 | length 49.7
  Top Layer w0.5: R33.2 R34.2 ; 53.34,49.3 54.6,49.3 55.4,48.5 55.4,45.6 56.8,44.2 68.7,44.2 70.7,42.2 v1(83.6,42.2)
  Bottom Layer w0.5: S1.41 82.907,51.193 83.6,50.5 v1(83.6,42.2)
PGC: J4.5 U5.39 | length 6.4
  Bottom Layer w0.5: U5.39 J4.5@49.68,65.46
PGD: J4.4 U5.40 | length 6.4
  Bottom Layer w0.5: U5.40@43.26,67.98 J4.4
PGM: J4.6 U5.36 | length 11
  Bottom Layer w0.5: U5.36 48.84,57.84 49.7,58.7 J4.6
PS2_CL: J6.5 R9.1 U5.33 | length 59.6
  Top Layer w0.5: v1(55.8,32.5) 55.8,13.7 56.7,12.8 62.1,12.8 62.6,12.3 J6.5
  Bottom Layer w0.5: R9.1 U5.33 45.08,50.22 45.8,49.5 45.8,47.4 47,46.2 54.4,46.2 55.8,44.8 v1(55.8,32.5)
PS2_DA: J6.1 R8.1 U5.30 | length 54.3
  Top Layer w0.5: U5.30 45.1,42.6 45.4,42.3 45.4,25.8 48,23.2 v1(48,18.4)
  Bottom Layer w0.5: R8.1 U5.30 ; v1(48,18.4) 48,16.9 48.5,16.4 48.5,13.6 49.5,12.6 53.5,12.6 54.3,11.8 54.3,7.3 55.2,6.4 60.2,6.4 60.6,6.8 J6.1
RS: J3.9 R14.1 U5.2 | length 13.8
  Top Layer w1.6: J3.9 23.6,61.96
  Bottom Layer w0.5: J3.9 22.4,64.2 23.66,65.46 R14.1
  Bottom Layer w1.6: J3.9 22.4,63.16
RXD: D1.A D4.A D5.A R4.1 U5.26 | length 18.8
  Bottom Layer w0.5: R4.1 U5.26 46.34,32.44 46.9,33 46.9,36.05 48.15,37.3 D1.A
RXD_IMP: U4.10 U9.6 | length 30.2
  Top Layer w0.5: v1(63.4,15.3) 65.7,15.3 67.3,16.9 67.3,21.64 68.3,22.64 U4.10
  Bottom Layer w0.5: U9.6 53.3,17.2 54.3,16.2 54.3,14.4 55.9,12.8 62,12.8 63.4,14.2 v1(63.4,15.3)
RXD_MODEM: R33.1 U9.3 | length 28.3
  Top Layer w0.5: R33.1 47,48 46.4,47.4 46.4,26.3 47.88,24.82 U9.3
RXD_RS232: J8.3 U4.13 | length 21.6
  Top Layer w0.5: J8.3 67,25.6 68.7,27.3 71.8,27.3 72.7,26.4 72.7,15.5 72.22,15.02 U4.13
RXD_RS232_IMP: J7.3 U4.7 | length 6.9
  Top Layer w0.5: U4.7 79.74,22.64 82.7,25.6 J7.3
SIM_CLOCK: J9.3 S1.31 U10.4 | length 23
  Top Layer w0.5: J9.3 79.2,49.6 82,52.4 v1(82,57.6)
  Bottom Layer w0.3: v1(82,57.6) 86.2,57.6 86.4,57.8 U10.4
  Bottom Layer w0.5: S1.31 v1(82,57.6)
SIM_DATA: J9.6 S1.29 U10.1 | length 13.9
  Top Layer w0.3: 83.2,56.908 v1(83.2,58.807)
  Top Layer w0.5: J9.6 83.2,56.908
  Bottom Layer w0.3: S1.29 84.468,58.807 U10.1
SIM_RESET: J9.2 S1.27 U10.2 | length 29.7
  Top Layer w0.3: 80.703,60.103 80.776,60.103
  Top Layer w0.5: J9.2 71.3,47 70.7,47.6 70.7,50.3 71.2,50.8 78.9,50.8 80.6,52.5 80.6,59.927 80.776,60.103 v1(82,60.103)
  Bottom Layer w0.3: v1(82,60.103) U10.2@84.472,60.103
  Bottom Layer w0.5: S1.27 v1(82,60.103)
SIM_VDD: J9.1 S1.25 U10.5 | length 38.7
  Top Layer w0.3: 81.445,61.372 v1(83.2,61.372)
  Top Layer w0.5: J9.1 71.5,44.4 70.674,45.226 69.7,46.2 69.7,51 70.5,51.8 78.4,51.8 79.6,53 79.6,60.4 80.572,61.372 81.445,61.372
  Bottom Layer w0.3: 81.445,61.372 86.028,61.372 86.4,61 U10.5
  Bottom Layer w0.5: S1.25 81.445,61.372
TXD: R6.1 U4.11 U5.25 U9.1 U9.4 | length 42.9
  Top Layer w0.5: U9.4 52.78,22.28 53.25,22.75 53.25,28.8 52.7,29.35 52.7,29.7 52.5,29.9 U9.1
  Bottom Layer w0.25: 57.3,21 60.1,21
  Bottom Layer w0.5: R6.1 U9.1 ; U9.4 53.02,22.28 54.3,21 57.3,21 ; 60.1,21 67.4,21 68.3,20.1 U4.11
TXD_IMP: U4.9 U9.9 | length 18
  Top Layer w0.5: v1(65.2,17.2) 65.2,21.5 68.88,25.18 U4.9
  Bottom Layer w0.5: U9.9 v1(65.2,17.2)
TXD_MODEM: S1.43 U9.12 | length 46.5
  Bottom Layer w0.5: U9.12 62.22,24.82 63,25.6 63,33.4 68.1,38.5 81.2,38.5 81.9,39.2 81.9,49.5 81.476,49.924 S1.43
TXD_RS232: J8.2 U4.14 | length 26.4
  Top Layer w0.5: J8.2 67.5,28.14 68,28.64 72.36,28.64 73.8,27.2 73.8,13.7 72.58,12.48 U4.14
TXD_RS232_IMP: J7.2 U4.8 | length 6.9
  Top Layer w0.5: U4.8 79.78,25.18 82.74,28.14 J7.2
VBAT: C6.1 C12.2 C26.2 C27.1 R3.2 S1.1 S1.3 S1.5 S1.7 S1.9 U3.4 | length 71.9
  Top Layer w0.8: U3.4@22.327,79.873 C26.2
  Bottom Layer w0.7: R3.2 46.053,81.547 48.35,79.25 74.8,79.25 75.95,78.1 79,78.1 79.8,77.3 S1.9
  Bottom Layer w0.8: v1(24.707,79.873) 24.707,82.473 25.907,83.673 36.807,83.673 37.413,83.067 R3.2
VCC: C4.1 C7.2 C9.2 L1.1 U1.1 U2.1 | length 53.4
  Top Layer w1.2: U1.1 7.5,14.82 7.5,19.75 10,22.25 C4.1
  Bottom Layer w1.2: U2.1 L1.1 ; 8.886,54.864 C9.2 10.75,52 11.5,51.25 11.5,31 10,29.5 C4.1
VDD: C16.1 C17.1 C18.2 J4.2 L2.1 U5.11 U5.32 | length 67.8
  Top Layer w0.5: U5.32 44.98,47.68 46,48.7 v1(46,54.2)
  Top Layer w0.8: U5.11 31.25,42.6 36.33,47.68 U5.32
  Bottom Layer w0.5: v1(46,54.2) 46,55.9 46.8,56.7 49.6,56.7 51.7,58.8 51.7,72.7 51.24,73.16 J4.2
  Bottom Layer w0.8: L2.1 16.7,44.2 18.04,45.54 24.46,45.54 25.314,44.686 25.314,42.6 U5.11
VPP: J4.3 R20.1 U5.1 | length 25.8
  Top Layer w0.5: U5.1 37,68 v1(39.7,70.7)
  Bottom Layer w0.5: U5.1 R20.1 ; v1(39.7,70.7) 49.558,70.7 J4.3
pads on no net: J3.4 J6.2 J6.6 J6.7 J6.8 J9.5 S1.11 S1.12 S1.13 S1.14 S1.15 S1.18 S1.20 S1.21 S1.22 S1.23 S1.24 S1.26 S1.28 S1.30 S1.32 S1.34 S1.35 S1.36 S1.38 S1.40 S1.42 S1.44 S1.45 S1.46 S1.47 S1.48 S1.49 S1.50 S1.51 S1.52 S1.53 S1.54 S1.55 S1.56 S1.57 S1.58 S1.59 S1.60 U5.8 U5.9 U5.10 U5.22 U5.27 U5.28 U6.7 U7.7 U8.7
copper on no net: | length 14.2
  Top Layer w1.6: 18.66,54.34 19.86,54.34
  Bottom Layer w0: 72.8,70.3 72.8,76.2 ; 76.1,71.1 76.1,77
  Bottom Layer w1.6: 18.66,54.34 19.86,54.34

## Polygon pours and split planes (outlines as drawn)
GND on Top Layer (solid, remove dead copper): 0,84.7 0,0 88,0 88,84.7
GND on Bottom Layer (solid, remove dead copper): 0,84.7 0,0 88,0 88,84.7

## Keep-outs
Keep-Out Layer:
  lines w0.254: 0,0 88,0 88,84.7 0,84.7 0,0

## Silkscreen, mask and mechanical layers (free items; w line width, h text height)
Top Overlay:
  lines w0.2: 11.296,2.695 cw(c11.748,2.668) 12.199,2.709 ccw(c12.65,2.75) 13.102,2.723
  text "MD1" at 66.5,66.7 h1.52
  text "ICSP" at 55.2,66.2 h1.52 r90
  text "PWRM" at 60.3,61.1 h1.52
  text "LCD" at 25.6,54.7 h1.52 r90
  text "PWR" at 60.3,52.8 h1.52
  text "SIM CARD" at 87.3,42.3 h1.52 r90
  text "IMP." at 80.4,26.8 h1.52 r90
  text "Teclado" at 58.5,12.1 h1.2
  text "MEM 1" at 16.7,4.1 h1
  text "6-12V" at 13.8,2.3 h1
Bottom Overlay:
  text "06/01/10" at 65.3,73.8 h1
Top Solder:
  rectangle: 4.2,72.6 18.8,83.7
  rectangle: 0.1,34.1 10.9,50.3
Bottom Solder:
  rectangle: 8.3,72.8 18.6,83.4